# Altium PCB brush_driver.PcbDoc
Units mil, origin at the board's own origin, x right, y up, seen from the top; angles counter-clockwise.
Board outline 2420.19 x 1285.19 mil, 2 copper layers (Top Layer, Bottom Layer); 85 components, 97 nets, 290 pads, 90 vias.
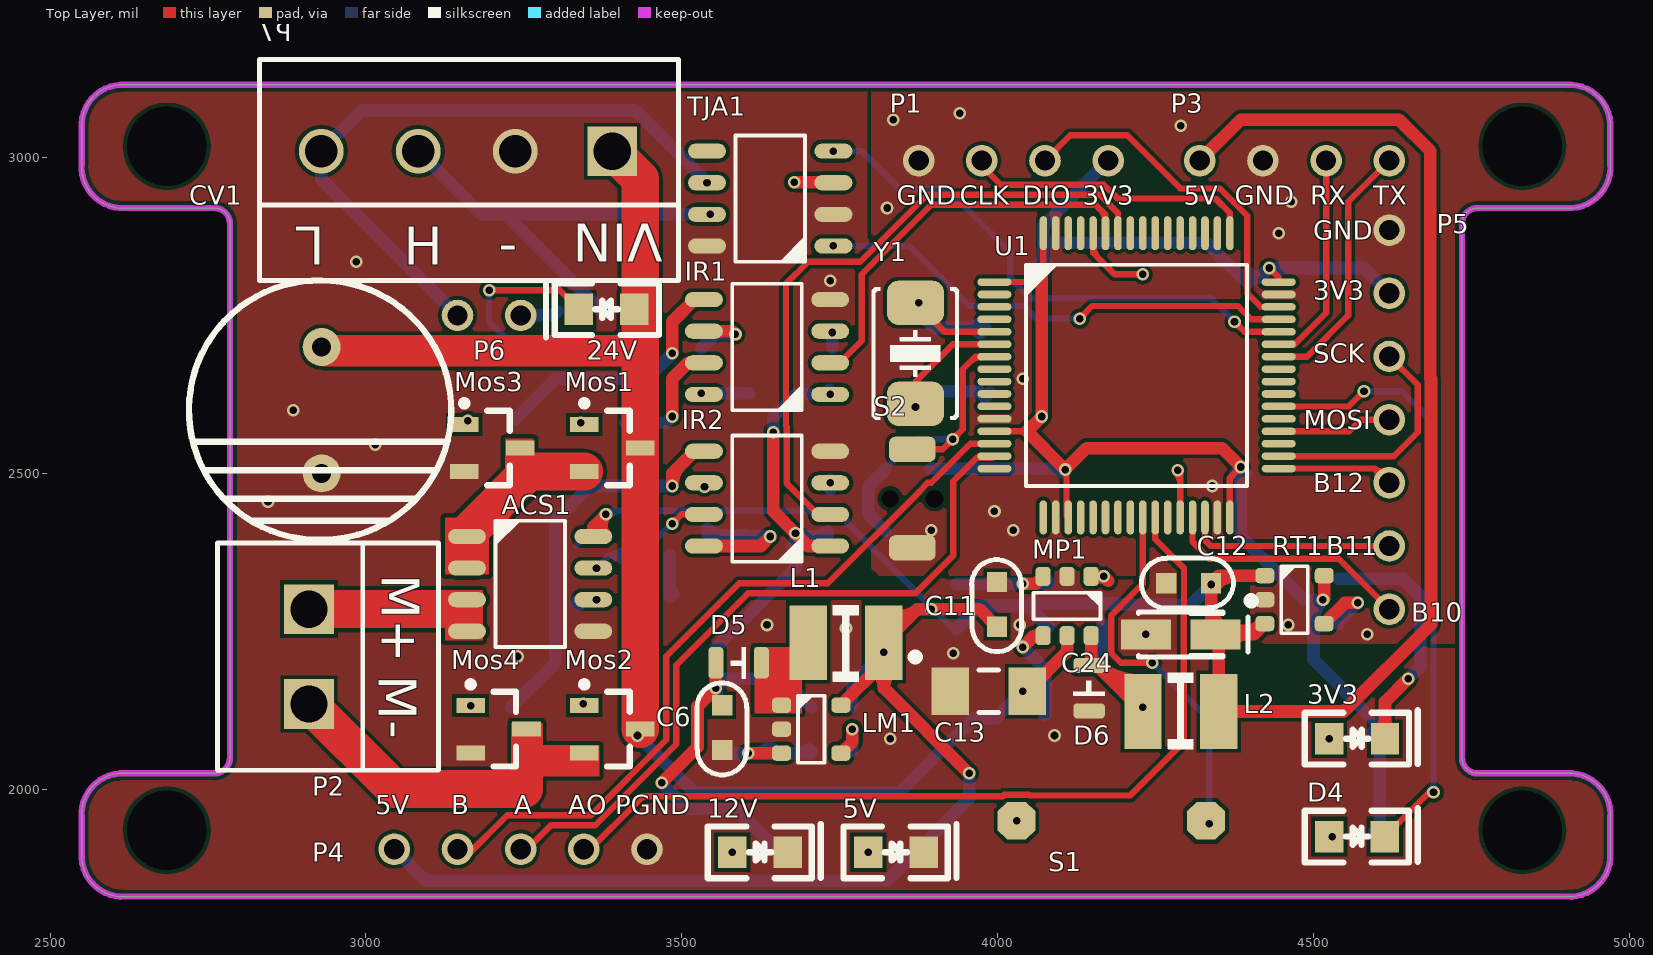
[diagram p0: Top Layer view]
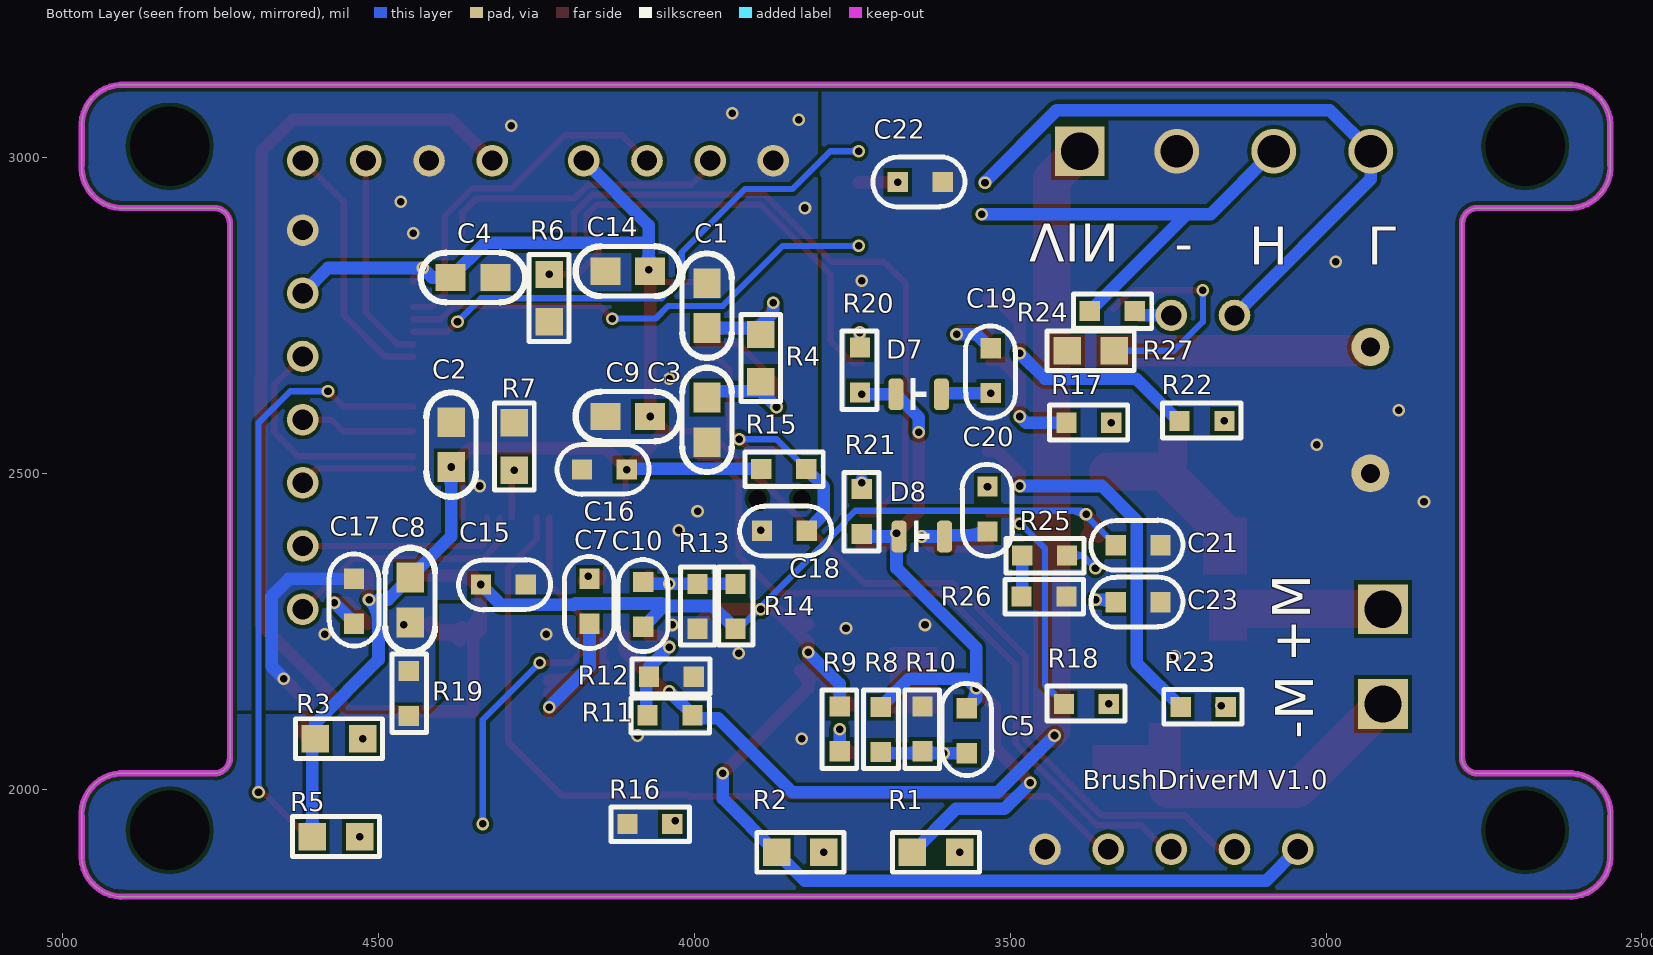
[diagram p1: Bottom Layer view, seen from below]
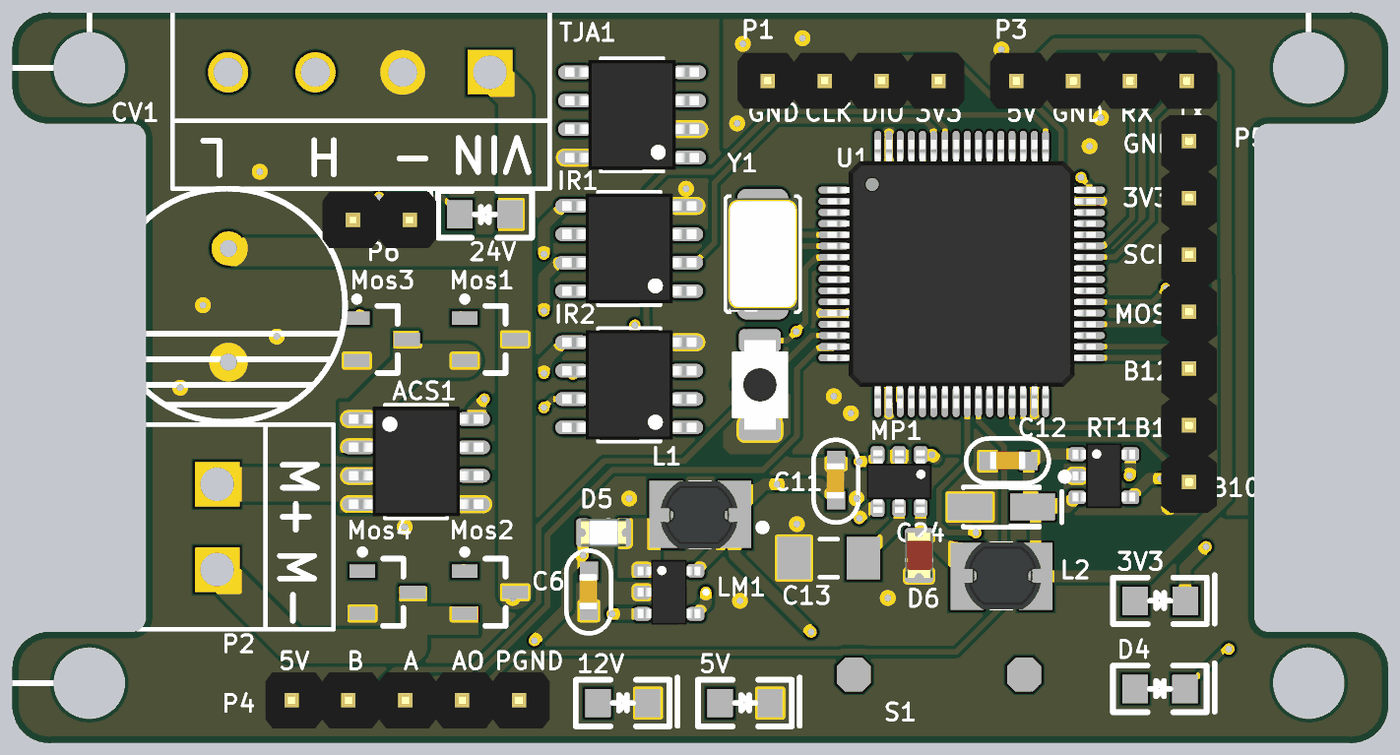
[diagram p2: 3D render of the assembled board from above, using the file's embedded part models]
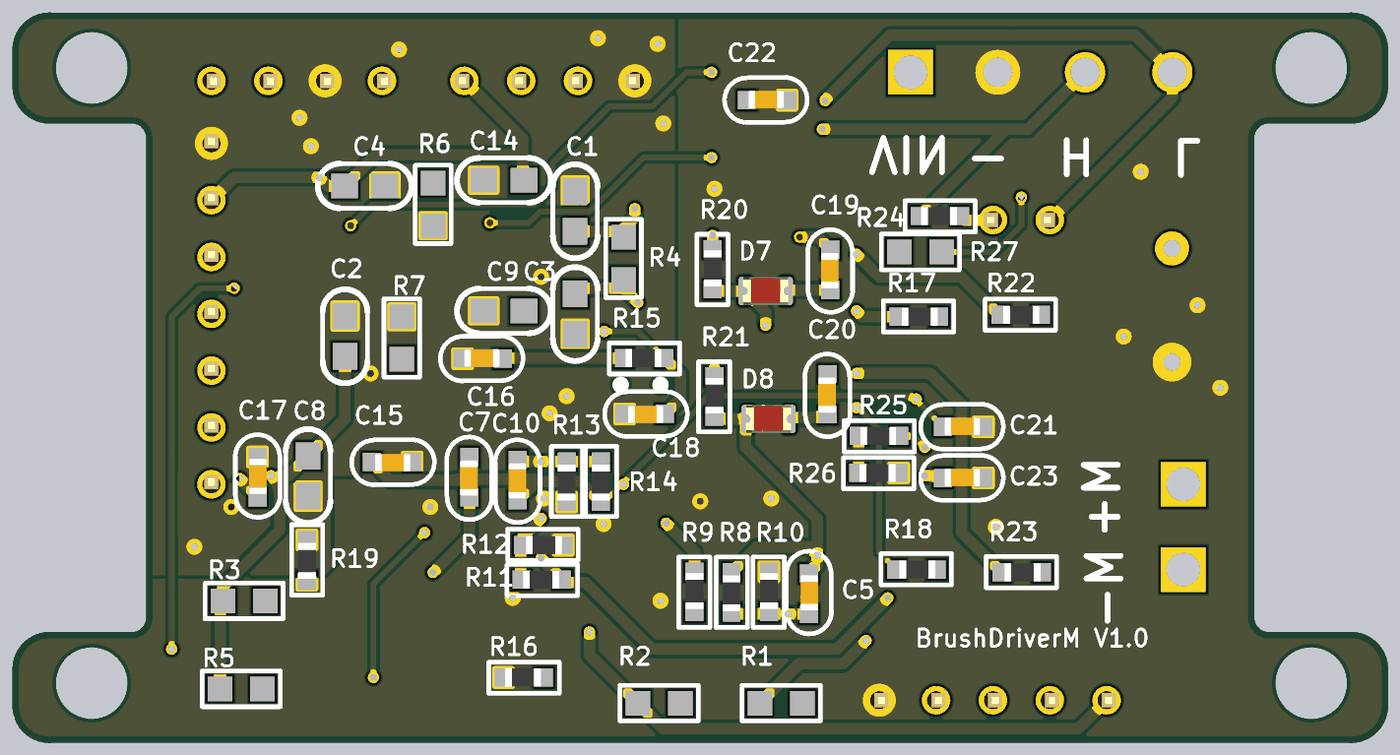
[diagram p3: 3D render of the assembled board from below, using the file's embedded part models]

## Layer stack, top to bottom
Top Layer: signal copper 1.4
Dielectric: dielectric 12.6, FR-4, Dk 4.8
Bottom Layer: signal copper 1.4

## Board outline
2550,1890 ccw(c2615,1895) 2620,1830 4900,1830 ccw(c4905,1895) 4970,1890 4970,1955 ccw(c4905,1960) 4910,2025 4760,2025 cw(c4760,2050) 4735,2050 4735,2895 cw(c4760,2895) 4760,2920 4910,2920 ccw(c4905,2985) 4970,2990 4970,3055 ccw(c4905,3050) 4900,3115 2620,3115 ccw(c2615,3050) 2550,3055 2550,2990 ccw(c2615,2985) 2610,2920 2760,2920 cw(c2760,2895) 2785,2895 2785,2050 cw(c2760,2050) 2760,2025 2610,2025 ccw(c2615,1960) 2550,1955

## Design rules (kind name [scope] priority, off if disabled: settings)
Clearance [All] p1: gap=6
PolygonConnect [All] p1: connectstyle=Direct reliefconductorwidth=10 reliefentries=4 polygonreliefangle="90 Angle" airgapwidth=10
RoutingVias [All] p1: holewidth=28 width=50 viastyle="Through Hole" minholewidth=0 minwidth=0 maxholewidth=28 maxwidth=50
SolderMaskExpansion [All] p1: expansion=4
Width [All] p1: maxlimit=100 minlimit=10 preferedwidth=10 minimp=50.000000 maximp=50.000000 favimp=50.000000
28 further rules are at their usual default settings.

## Components (designator, comment, footprint, x,y, rotation, side; value= is the part's Value field where it differs from the comment)
3V3 "lED" 0805D 4525.2,2080 r0 top
5V "lED" 0805D 3795,1900 r0 top
12V "lED" 0805D 3580,1900 r0 top
24V "lED" 0805D 3425,2760 r180 top
ACS1 "ACS712" SOP_E150_8 3260,2325 r0 top
C1 "Cap" CAP-MLCC-0603 3980,2800.87 r90 bottom
C2 "Cap" CAP-MLCC-0603 4385,2510 r270 bottom
C3 "Cap" CAP-MLCC-0603 3980,2549.13 r270 bottom
C4 "Cap" CAP-MLCC-0603 4385.87,2810 r0 bottom
C5 "Cap_0603" CAP_0603 3570,2095 r270 bottom
C6 "Cap_0603" CAP_0603 3565,2095 r90 top
C7 "Cap_0603" CAP_0603 4165,2295 r90 bottom
C8 "Cap" CAP-MLCC-0603 4450,2335 r90 bottom
C9 "Cap" CAP-MLCC-0603 4070,2590 r180 bottom
C10 "Cap_0603" CAP_0603 4080,2290 r90 bottom
C11 "Cap_0603" CAP_0603 4000,2290 r90 top
C12 "Cap_0603" CAP_0603 4300,2325 r0 top
C13 "Cap_0805" CAP-MLCC-1206 3925,2155 r0 top
C14 "Cap" CAP-MLCC-0603 4070,2820 r180 bottom
C15 "Cap_0603" CAP_0603 4300,2325 r0 bottom
C16 "Cap_0603" CAP_0603 4145,2505 r180 bottom
C17 "Cap_0603" CAP_0603 4540,2300 r270 bottom
C18 "Cap_0603" CAP_0603 3855,2410 r0 bottom
C19 "Cap_0603" CAP_0603 3530,2660 r90 bottom
C20 "Cap_0603" CAP_0603 3535,2441 r90 bottom
C21 "Cap_0603" CAP_0603 3300,2385 r180 bottom
C22 "Cap_0603" CAP_0603 3645,2960 r180 bottom
C23 "Cap_0603" CAP_0603 3300,2295 r180 bottom
C24 "*μF" CAP-TAN-3216/CAPA 4345,2245 r0 top
CV1 "680uF" C_ELE2 2930,2700 r270 top
D4 "lED" 0805D 4525,1925 r0 top
D5 "D_0805" LED_0805_YELLOW 3590,2200 r180 top
D6 "Diode" LED_0805_RED 4145,2160 r90 top
D7 "Diode" LED_0805_RED 3645,2625 r180 bottom
D8 "Diode" LED_0805_RED 3640,2400 r180 bottom
IR1 "ir2104" SOP_E150_8 3635,2700 r180 top
IR2 "ir2104" SOP_E150_8 3635,2460 r180 top
L1 "Ind_CD32" IND_CD52 3760,2225 r180 top
L2 "Ind_CD32" IND_CD52 4290,2130 r0 top
LM1 "LM27313" SOT23-5 3705,2095 r0 top
Mos1 "MOSFET N" Nmos_SOT23 3390,2540 r0 top
Mos2 "MOSFET N" Nmos_SOT23 3390,2095 r0 top
Mos3 "MOSFET N" Nmos_SOT23 3200,2540 r0 top
Mos4 "MOSFET N" Nmos_SOT23 3210,2095 r0 top
MP1 "MP2451" SOT23-6 4110,2290 r270 top
P1 "HDR1x4_2.54" HDR1x4_2.54_180 4175,2995 r270 top
P2 "Header 2" Green_2P 2815,2210 r270 top
P3 "HDR1x4_2.54" HDR1x4_2.54_180 4320,2995 r90 top
P4 "HDR1x5_2.54" HDR1X5_2.54_180 3045,1905 r90 top
P5 "HDR1x7_2.54" HDR1X7_2.54_180 4620,2885 r0 top
P6 "HDR1x2_2.54" HDR1X2_2.54_180 3245,2750 r270 top
P7 "Header 4" Green_4P 3315,3105 r180 top
R1 "Res1" RES-0603 3580.2,1900 r180 bottom
R2 "Res1" RES-0603 3795,1900 r180 bottom
R3 "Res1" RES-0603 4525.2,2080 r180 bottom
R4 "Res1" RES-0603 3895,2645 r270 bottom
R5 "Res1" RES-0603 4530,1925 r180 bottom
R6 "Res1" RES-0603 4230,2814.8 r90 bottom
R7 "Res1" RES-0603 4285,2505 r270 bottom
R8 "Res_0603" RES_0603 3623,2093 r270 bottom
R9 "Res_0603" RES_0603 3852,2097 r90 bottom
R10 "Res_0603" RES_0603 3721,2097 r90 bottom
R11 "Res_0603" RES_0603 4040,2035 r0 bottom
R12 "Res_0603" RES_0603 4035,2260 r180 bottom
R13 "Res_0603" RES_0603 3913,2288 r270 bottom
R14 "Res_0603" RES_0603 3853,2288 r270 bottom
R15 "Res_0603" RES_0603 3860,2425 r0 bottom
R16 "Res_0603" RES_0603 4072,1863 r0 bottom
R17 "Res_0603" RES_0603 3374,2662 r180 bottom
R18 "Res_0603" RES_0603 3378,2217 r180 bottom
R19 "Res_0603" RES_0603 4370,2150 r270 bottom
R20 "Res_0603" RES_0603 3820,2665 r90 bottom
R21 "Res_0603" RES_0603 3817,2441 r90 bottom
R22 "Res_0603" RES_0603 3195,2665 r180 bottom
R23 "Res_0603" RES_0603 3193,2212 r180 bottom
R24 "Res_0603" RES_0603 3340,2675 r0 bottom
R25 "Res_0603" RES_0603 3447,2288 r0 bottom
R26 "Res_0603" RES_0603 3448,2223 r0 bottom
R27 "Res1" RES-0603 3410,2694 r0 bottom
RT1 "RT9193" SOT23-5 4470,2300 r0 top
S1 "SW-PB" "key - duplicate" 4210,1950 r180 top
S2 "ButtonTACT_3x4x2_180" ButtonTACT_3x4x2_180H 3865,2460 r270 top
TJA1 "TJA1050" SOP_E150_8 3640,2935 r180 top
U1 "STM32F103RC" LQFP_P0.5_64 4220,2655.16 r0 top
Y1 "8M" XT_5032_2 3870,2690 r90 top

## Footprints (in the part's own frame and the unit in brackets; to place one, negate y for a bottom-side part, rotate by r counter-clockwise, add the part's x,y. Pads: shape width x height; smd on the part's side, far side on the other; paste and mask are expansions set on the pad)
0805D [mil]
  rect 45x50 smd: A(0,0) K(88,0)
  silkscreen extent -39,-41 140,45
ButtonTACT_3x4x2_180H [mil]
  round 0 hole 28: 0(0,35) 0(0,-35)
  rrect50% 40x74 smd: 1(-78,0) 2(78,0)
  body extent -79,-49 79,49, height 63
C_ELE2 [mil]
  round 60 hole 30: 1(0,0) 2(200,0)
  silkscreen extent -105,-210 305,205
CAP-MLCC-0603 [mm]
  rect 1.2x1.1 smd: 1(0,0) 2(-1.8,0)
  silkscreen extent -3,-1 1.2,1, body extent -1.77,-0.47 -0.02,0.48, height 0.85
CAP-MLCC-1206 [mm]
  rect 1.5x1.9 smd: 1(0,0) 2(3.1,0)
  silkscreen extent -1.42,-0.85 1.95,1.37, body extent -0.15,-0.9 3.25,0.9, height 1.35
CAP-TAN-3216/CAPA [mm]
  rect 2x1.2 smd: 1(0,0) 2(-2.8,0)
  silkscreen extent -3.1,-0.9 1.45,1.37
CAP_0603 [mil]
  rect 32x32 smd: 1(-33,1) 2(38,1)
  silkscreen extent -72,-38 73,41, body extent -30,-14 33,18, height 31
Green_2P [mm]
  rect 2x2 hole 1.5: 1(-1.905,2.413) 2(1.905,2.413)
  silkscreen extent -4.57,-1.27 4.57,7.62
Green_4P [mm]
  rect 2x2 hole 1.5: 1(-1.905,2.413)
  round 1.8 hole 1.3: 2(1.995,2.413) 3(5.895,2.413) 4(9.795,2.413)
  silkscreen extent -4.57,-1.27 12.28,7.62
HDR1X2_2.54_180 [mil]
  round 50 hole 32: 1(0,0) 2(0,-100)
  body extent -49,-150 49,50, height 323
HDR1x4_2.54_180 [mil]
  round 50 hole 32: 1(0,0) 2(0,-100) 3(0,-200) 4(0,-300)
  body extent -49,-350 49,50, height 323
HDR1X5_2.54_180 [mil]
  round 50 hole 32: 1(0,0) 2(0,-100) 3(0,-200) 4(0,-300) 5(0,-400)
  body extent -49,-450 49,50, height 323
HDR1X7_2.54_180 [mil]
  round 50 hole 32: 1(0,0) 2(0,-100) 3(0,-200) 4(0,-300) 5(0,-400) 6(0,-500) 7(0,-600)
  body extent -49,-650 49,50, height 323
IND_CD52 [mil]
  rect 59.06x118.11 smd: 1(-60,-7) 2(60,-7)
  silkscreen extent -20,-66 20,54, body extent -66,-65 70,53, height 83
"key - duplicate" [mil]
  oct 60x60 smd: 1(-120,0) 2(180,0)
LED_0805_RED [mil]
  rrect50% 24x50 smd: 1(-36,0) 2(36,0)
  silkscreen extent -12,-24 12,24, body extent -40,-25 40,25, height 43
LED_0805_YELLOW [mil]
  rrect50% 24x50 smd: 1(-36,0) 2(36,0)
  silkscreen extent -12,-24 12,24, body extent -40,-25 40,25, height 43
LQFP_P0.5_64 [mil]
  oval 54x12 smd: 1(-225,147.64) 2(-225,127.95) 3(-225,108.27) 4(-225,88.58) 5(-225,68.9) 6(-225,49.21) 7(-225,29.53) 8(-225,9.84) 9(-225,-9.84) 10(-225,-29.53) 11(-225,-49.21) 12(-225,-68.9) 13(-225,-88.58) 14(-225,-108.27) 15(-225,-127.95) 16(-225,-147.64) 33(225,-147.64) 34(225,-127.95) 35(225,-108.27) 36(225,-88.58) 37(225,-68.9) 38(225,-49.21) 39(225,-29.53) 40(225,-9.84) 41(225,9.84) 42(225,29.53) 43(225,49.21) 44(225,68.9) 45(225,88.58) 46(225,108.27) 47(225,127.95) 48(225,147.64)
  oval 12x54 smd: 17(-147.64,-225) 18(-127.95,-225) 19(-108.27,-225) 20(-88.58,-225) 21(-68.9,-225) 22(-49.21,-225) 23(-29.53,-225) 24(-9.84,-225) 25(9.84,-225) 26(29.53,-225) 27(49.21,-225) 28(68.9,-225) 29(88.58,-225) 30(108.27,-225) 31(127.95,-225) 32(147.64,-225) 49(147.64,225) 50(127.95,225) 51(108.27,225) 52(88.58,225) 53(68.9,225) 54(49.21,225) 55(29.53,225) 56(9.84,225) 57(-9.84,225) 58(-29.53,225) 59(-49.21,225) 60(-68.9,225) 61(-88.58,225) 62(-108.27,225) 63(-127.95,225) 64(-147.64,225)
  silkscreen extent -175,-175 175,175, body extent -236,-236 236,236, height 59
Nmos_SOT23 [mm]
  rect 1.15x0.6 smd: D(1.125,0) G(-1.125,0.95) S(-1.125,-0.95)
  silkscreen extent -1.25,-1.5 0.7,1.92, body extent -0.7,-1.5 0.7,1.5, height 1.14
RES-0603 [mm]
  rect 1.1x1.1 smd: 1(0,0) 2(-1.9,0)
  silkscreen extent -2.7,-0.8 0.8,0.8, body extent -1.8,-0.47 -0.1,0.48, height 0.6
RES_0603 [mil]
  rect 32x32 smd: 1(-37,-82) 2(34,-82)
  silkscreen extent -64,-109 60,-54, body extent -31,-98 31,-66, height 18
SOP_E150_8 [mil]
  oval 60x24 smd: 1(-100,75) 2(-100,25) 3(-100,-25) 4(-100,-75) 5(100,-75) 6(100,-25) 7(100,25) 8(100,75)
  silkscreen extent -55,-100 55,100, body extent -118,-96 118,96, height 69
SOT23-5 [mil]
  rrect50% 30x24 smd: 1(-47,38) 2(-47,0) 3(-47,-38) 4(47,-38) 5(47,38)
  silkscreen extent -21,-53 21,53, body extent -55,-57 55,57, height 57
SOT23-6 [mil]
  rrect50% 30x24 smd: 1(-47,38) 2(-47,0) 3(-47,-38) 4(47,-38) 5(47,0) 6(47,38)
  silkscreen extent -21,-53 21,53, body extent -55,-57 55,57, height 57
XT_5032_2 [mil]
  rrect50% 70x90 smd: 1(-80,0) 2(80,0)
  silkscreen extent -104,-68 104,68, body extent -98,-63 98,63, height 39

## Part data
3V3 5V 12V 24V D4: library part 00-D-LED, "LED"
ACS1: "Sensor Current"
C1 C2 C3 C4 C8 C9 C14: library part Cap_1, "Capacitor"
C5 C6 C7 C10 C11 C12 C13 C15 C16 C17 C18 C19 C20 C21 C22 C23: "Capacitor"
C24: library part CAP-TAN, "钽电容"
CV1: library part CAP-ELE, "电解电容"
L1 L2: "Inductor"
Mos1 Mos2 Mos3 Mos4: "MOS SOT23"
P1 P3 P4 P6: "Header"
P2: "Header, 2-Pin"
P5: library part HDR1x7_2.54T, "Header"
P7: "Header, 4-Pin"
R1 R2 R3 R4 R5 R6 R7 R27: library part Res1_1, "Resistor"
R8 R9 R10 R11 R12 R13 R14 R15 R16 R17 R18 R19 R20 R21 R22 R23 R24 R25 R26: "Resistor"
RT1: "Power"
S1: "Switch"
S2: "Button"
U1: "MCU"
Y1: library part C-Osc, "Crystal Oscillator"

## Free pads (board coordinates)
  round 0 hole 125.98 unplated: 2(2685,1935) 2(2685,3017.68) 2(4830.67,1935) 2(4830.67,3017.68)

## Via types
v1: diameter 20, hole 12, Top Layer to Bottom Layer, 90 vias

## Nets (pads, with @x,y where several pads share a name; then routed paths per layer and width w, separated by ;. In a path a pad name is that pad's centre, name@x,y a point inside that pad or via, vN(x,y) a via of type N, cw(c..) or ccw(c..) an arc to the next point about the centre after c; other vN are vias at no path point)
3V3: C2.1 C4.1 C8.1 C9.1 C14.1 C16.2 P1.1 P5.2 R3.2 R5.2 R15.2 RT1.5 U1.1 U1.13 U1.19 U1.32 U1.48 U1.64 | length 3135.4
  Top Layer w10: U1.13 4046.57,2566.57 ; U1.1 4052.8,2802.8 4070,2820 v1(4072.36,2822.36) U1.64 ; v1@4067.36,2822.36 cw(c4055.29,2822.36) 4063.83,2813.83 cw(c4072.36,2805.29) v1@4072.36,2817.36 ; v1@4068.83,2825.9 ccw(c4060.29,2834.43) 4072.36,2834.43 ccw(c4084.43,2834.43) v1@4075.9,2825.9 ; v1(4107,2506) 4109.05,2503.95 4109.05,2432.84 U1.19 ; 4109.05,2460.05 ccw(c4120.63,2460.05) U1.19@4112.44,2451.87 ; U1.32 4367.64,2492.64 v1(4385,2510) ; v1@4380,2510 cw(c4367.93,2510) 4376.46,2501.46 cw(c4385,2492.93) v1@4385,2505 ; v1@4430,2820 cw(c4430,2807.93) 4438.54,2816.46 cw(c4447.07,2825) v1@4435,2825 ; v1(4430,2825) 4445,2810 U1.48
  Top Layer w20: v1@4070,2820 v1(4070,2590) 4046.57,2566.57 4107,2506.15 4140.85,2540 4355,2540 v1(4385,2510) ; v1(4515,2300) 4517,2302 RT1.5
  Bottom Layer w20: R15.2 C16.2@4106,2507 ; C14.1@4063.73,2828.24 ccw(c4042.88,2849.08) 4072.36,2849.08 ; v1(4072.36,2822.36) 4072.36,2865 ; 4072.36,2847.18 ccw(c4099.15,2847.18) C14.1@4080.21,2828.24 ; 4090.1,2507 cw(c4090.1,2489.1) C16.2@4102.76,2501.76 ; P1.1 4072.36,2892.36 4072.36,2865 ; C2.1@4376.76,2499.79 cw(c4356.87,2479.9) 4385,2479.9 cw(c4413.13,2479.9) C2.1@4393.24,2499.79 ; v1(4385,2510) 4385,2400 C8.1 4485,2300 4500,2300 4500,2205 4600,2105 ; C4.1@4396.28,2801.97 cw(c4415,2784.17) 4415,2810 ; C4.1@4396.28,2818.03 ccw(c4415,2835.83) 4415,2810 ; 4500,2263.79 cw(c4551.21,2263.79) v1(4515,2300) ; R3.2@4592.51,2088.93 ccw(c4579.01,2105) 4600,2105 ; R5.2@4596.56,1933.24 ccw(c4576.67,1953.13) 4604.8,1953.13 ccw(c4632.94,1953.13) R5.2@4613.04,1933.24 ; R5.2 4604.8,2075.2 R3.2 4600,2105 ; R3.2@4607.49,2088.93 cw(c4620.99,2105) 4600,2105 ; P5.2 4580,2825 v1(4430,2825) 4415,2810 ; 4072.36,2865 4330.87,2865 C4.1 4415,2810
5V: ACS1.8 C10.1 C11.1 C12.2 C15.2 C21.1 C24.1 L1.1 L2.2 LM1.5 P3.1 P4.1 R2.2 R9.2 R14.2 RT1.1 RT1.3 | length 5418.7
  Top Layer w20: ACS1.8 3360,2415 v1(3380,2435) ccw(c3397.09,2417.9) ACS1.8@3379.46,2401.37 ; LM1.5 L1.1@3820,2201 ; L1.1@3807.29,2187.65 cw(c3783.58,2160) 3820,2160 ; L1.1@3809.04,2190.04 ccw(c3782.58,2216.5) v1(3820,2216.5) ; L1.1@3819.77,2261.11 ccw(c3833.6,2286.54) 3854.07,2266.07 ; L1.1@3829.33,2278.68 ccw(c3846.94,2311.06) 3873,2285 ; L1.1@3830.96,2242.96 ccw(c3857.42,2216.5) v1(3820,2216.5) ; L1.1@3832.71,2187.65 ccw(c3856.42,2160) 3820,2160 ; v1(3955,2025) 3820,2160 ; C11.1 3971,2285 v1(3895,2285) 3873,2285 ; P3.1 4385,3060 4635,3060 4685,3010 4685,2650.7 4686,2649.7 4686,2261 4548,2123 L2.2 4350,2240 C24.1 ; 4338,2294.79 ccw(c4394.79,2294.79) C24.1@4354.63,2254.63 ; C12.2@4342.24,2321.76 cw(c4381.46,2282.54) 4381.46,2338 ; C12.2@4348.53,2325.39 cw(c4341.59,2337.4) v1(4338,2324) cw(c4371.8,2290.2) 4371.8,2338 ; C24.1@4367.93,2256.58 ccw(c4389.28,2291) 4399.77,2251.87 ; C24.1@4370.38,2235.37 cw(c4393.63,2212.11) 4393.63,2245 cw(c4393.63,2277.89) C24.1@4370.38,2254.63 ; C24.1@4372.55,2238.19 cw(c4390.78,2227.66) 4385.33,2248 ; C24.1@4374.13,2245 ccw(c4374.13,2307.87) RT1.3@4418.59,2263.41 ; RT1.3 4406,2245 C24.1 ; RT1.1 4350,2338 C12.2 4338,2252 C24.1 ; 3820,2160 L1.1@3820,2201 ; L1.1@3820,2201 v1(3820,2216.5) ; v1(3820,2216.5) L1.1 3873,2285
  Bottom Layer w10: C21.1 3388,2441 3745.56,2441 3762,2424.56 3762,2421.44 R14.2@3929.44,2254 ; v1@3383.54,2431.46 cw(c3406.56,2408.44) 3406.56,2441
  Bottom Layer w20: P4.1 3095,1855 3824.8,1855 R2.2 3955,1985.2 v1(3955,2025) ; R9.2 3770,2166.5 v1(3820,2216.5) ; R14.2 3971,2290 4048,2290 ; C10.1 4048,2290 ; v1(4338,2324) 4306,2292 4190.63,2292 4188.63,2294 4052,2294 4048,2290
12V: C5.1 C6.2 D5.2 D7.1 D8.1 IR1.1 IR2.1 R1.2 R8.1 R20.1 R21.1 | length 1483.5
  Top Layer w20: v1(3468.23,2010) 3525,2066.77 3525,2131 v1(3554,2160) D5.2 ; v1(3645,2565) 3645,2440 v1(3680,2405) 3700,2385 IR2.1
  Bottom Layer w20: v1(3468.23,2010) 3509.23,1969 3586,1969 R1.2 ; C5.1@3566.02,2130.98 cw(c3595.04,2160) v1(3554,2160) ; C5.1 3554,2143 v1(3554,2160) ; v1(3645,2565) 3645,2589 D7.1 R20.1@3730,2625 ; D8.1@3674.59,2385.59 cw(c3661.51,2372.51) 3680,2372.51 ; 3692.07,2400 cw(c3692.07,2417.07) v1(3680,2405) D8.1@3680,2400 ; R8.1 3660,2175 3569,2175 v1(3554,2160) ; 3710.86,2400 ccw(c3710.86,2428.14) R21.1@3730.76,2408.24 ; 3716.27,2625 ccw(c3716.27,2649.73) R20.1@3733.76,2632.24 ; R21.1@3731,2400 D8.1@3680,2400 ; v1(3554,2160) 3554,2224 3680,2350 D8.1@3680,2400
  other v1: 3735,2625
ACS: ACS1.1 ACS1.2 Mos1.S Mos3.D | length 259.7
  Top Layer w60: 3160,2380.9 3160,2405 3257.6,2502.6 Mos1.S ; ACS1.1 cw(c3172.07,2400) ACS1.1@3163.54,2408.54
AD: R25.2 R26.2 | length 79.5
  Bottom Layer w20: 3481,2321.9 ccw(c3498.9,2321.9) R26.2@3486.24,2309.24 ; R25.2 3481,2306 R26.2
BOOT0: R6.1 U1.60 | length 164.5
  Top Layer w10: U1.60 4151.1,2848.9 4185,2815 v1(4230,2815) ; U1.60@4152.1,2859.16 ccw(c4179.29,2859.16) 4160.06,2839.94 ; v1@4226.46,2811.46 ccw(c4217.93,2802.93) 4217.93,2815 ccw(c4217.93,2827.07) v1@4226.46,2818.54
BOOT1: R7.1 U1.28 | length 96.4
  Top Layer w10: v1@4281.46,2501.46 cw(c4263.52,2483.52) 4288.9,2483.52 ; v1(4285,2505) 4288.9,2501.1 U1.28
CAN_H: P7.3 R24.2 TJA1.7 | length 719.9
  Bottom Layer w20: P7.3 3182.91,2910 3221,2910 ; R24.2 3221,2910 ; v1(3545,2910) 3221,2910
CAN_L: P6.2 P7.4 TJA1.6 | length 1035.3
  Bottom Layer w20: P6.2 2929.37,2965.63 P7.4 2994.37,3075 3426.37,3075 3540,2961.37 v1(3540,2960)
CAN_RX: TJA1.4 U1.44 | length 904.2
  Top Layer w10: v1@4375,2735 cw(c4375,2722.93) 4383.54,2731.46 cw(c4392.07,2740) v1@4380,2740 ; v1(4375,2740) 4390.94,2724.06 U1.44
  Bottom Layer w10: v1(3740,3010) 3785,3010 3845,2950 3920,2950 4020,2850 4020,2809.17 4051.82,2777.35 4337.65,2777.35 v1(4375,2740) ; v1@3743.54,3006.46 cw(c3752.07,2997.93) 3752.07,3010 cw(c3752.07,3022.07) v1@3743.54,3013.54 ; v1@4370,2740 ccw(c4357.93,2740) 4366.46,2748.54 ccw(c4375,2757.07) v1@4375,2745
CAN_TX: TJA1.1 U1.45 | length 826.6
  Top Layer w10: v1(4130,2745) 4150,2765 4380,2765 4401.26,2743.74 U1.45 ; v1@4130,2750 ccw(c4130,2762.07) 4138.54,2753.54 ccw(c4147.07,2745) v1@4135,2745
  Bottom Layer w10: v1(3740,2860) 3860,2860 3955,2765 4041.54,2765 4061.54,2745 v1(4130,2745) ; v1@3743.54,2856.46 cw(c3752.07,2847.93) 3752.07,2860 cw(c3752.07,2872.07) v1@3743.54,2863.54 ; v1@4126.46,2741.46 ccw(c4117.93,2732.93) 4117.93,2745 ccw(c4117.93,2757.07) v1@4126.46,2748.54
CSN: P5.7 U1.29 | length 394.2
  Top Layer w10: U1.29 4308.58,2391.42 4335,2365 4540,2365 P5.7
DC: P5.6 U1.30 | length 331.4
  Top Layer w10: U1.30 4328.27,2394.36 4337.63,2385 P5.6
DIS: U1.62
GND: 3V3.K C1.1 C2.2 C3.1 C4.2 C8.2 C9.2 C14.2 C15.1 C16.1 C17.1 C18.2 P1.4 P3.2 P5.1 R6.2 R7.2 R19.1 RT1.2 S2.2 U1.12 U1.18 U1.31 U1.47 U1.63 | length 437.7
  Top Layer w20: 3V3.K@4604.36,2091.34 ccw(c4583.02,2112.68) 4613.2,2112.68 ccw(c4643.37,2112.68) 3V3.K@4622.03,2091.34 ; 3V3.K 4613.2,2138.2 v1(4650,2175)
  Bottom Layer w20: C17.1 4642,2333 4669,2306 4669,2194 v1(4650,2175)
  other v1: 4585,2245 4460,2260 3895,2410 4025,2410 3995,2440 4340,2480 4040,2650 4445,2880 3825,2920 4465,2930 4290,3050 3835,3060 3940,3070
KEY: S1.1 U1.25 | length 656.2
  Top Layer w10: U1.25 4229.84,2325 4210.16,2305.32 4210.16,2305.16 4180,2275 4180,2215 4195,2200 v1(4245,2200) ; v1@4241.46,2196.46 ccw(c4232.93,2187.93) 4232.93,2200 ccw(c4232.93,2212.07) v1@4241.46,2203.54
  Bottom Layer w10: v1@4245,2195 cw(c4245,2182.93) 4253.54,2191.46 cw(c4262.07,2200) v1@4250,2200 ; v1(4245,2200) 4335,2110 v1(4335,1945) ; v1@4331.46,1948.54 ccw(c4322.93,1957.07) 4335,1957.07 ccw(c4347.07,1957.07) v1@4338.54,1948.54
MISO: U1.35
MOSI: P5.4 U1.36 | length 182.6
  Top Layer w10: U1.36 4556.57,2566.57 4575,2585 P5.4
MOT+: ACS1.3 ACS1.4 P2.1 | length 241.4
  Top Layer w60: P2.1@2911,2284 P2.1 3150,2285
MOT-: Mos2.S Mos4.D P2.2 | length 395.9
  Top Layer w60: P2.2 3045,2000 3250,2000
Net3V3_A: 3V3.A R3.1
  other v1: 4525.2,2080
Net5V_A: 5V.A R2.1
  other v1: 3795,1900
Net12V_A: 12V.A R1.1
  other v1: 3580,1900
Net24V_K: 24V.K R27.2 | length 401.6
  Top Layer w10: v1(3195,2790) 3307,2790 24V.K ; v1@3198.54,2786.46 cw(c3207.07,2777.93) 3207.07,2790 cw(c3207.07,2802.07) v1@3198.54,2793.54
  Bottom Layer w10: v1@3191.46,2786.46 cw(c3182.93,2777.93) 3195,2777.93 cw(c3207.07,2777.93) v1@3198.54,2786.46 ; v1(3195,2790) 3195,2740 3241,2694 R27.2
NetACS1_6: ACS1.6 C23.1 | length 55.8
  Bottom Layer w20: C23.1 3337,2300 v1(3365,2300) ; C23.1@3337.24,2291.76 cw(c3357.14,2271.86) v1@3357.14,2300
NetACS1_7: ACS1.7 R25.1 | length 110.2
  Bottom Layer w10: v1(3365,2350) 3385,2370 ; v1@3365,2355 ccw(c3365,2367.07) 3373.54,2358.54 ccw(c3382.07,2350) v1@3370,2350 ; R25.1@3401.89,2362.57 ccw(c3385,2347.09) 3385,2370 ; R25.1@3401.89,2377.43 cw(c3385,2392.91) 3385,2370 ; R25.1 3385,2370
NetC5_2: C5.2 LM1.3 R8.2 R10.1 | length 245.4
  Top Layer w20: v1(3605,2057) LM1.3
  Bottom Layer w20: C5.2 v1(3605,2057) 3703,2057 R8.2 ; 3617.27,2057 ccw(c3617.27,2081.73) R10.1@3634.76,2064.24 ; R10.1@3643.24,2064.24 ccw(c3660.73,2081.73) 3660.73,2057 ; 3685.69,2057 ccw(c3685.69,2078.31) R8.2@3700.76,2063.24
NetC7_1: C7.1 D6.2 L2.1 MP1.6 | length 482
  Top Layer w20: D6.2@4143.59,2197.41 ccw(c4132.93,2208.07) 4148,2208.07 ; MP1.6 D6.2@4148,2205 ; 4181.28,2171.72 ccw(c4228.78,2219.22) L2.1@4230.01,2152.06 ; L2.1@4218.05,2134.95 ccw(c4230,2146.9) v1(4230,2130) ; L2.1@4229.64,2172.05 cw(c4227.58,2284.58) D6.2@4148,2205 ; L2.1 D6.2@4148,2205
  Bottom Layer w20: C7.1 4166,2194 v1(4230,2130)
NetC7_2: C7.2 MP1.1 | length 58.1
  Top Layer w20: MP1.1 v1(4168,2337) 4175,2330 ccw(c4160.66,2315.66) MP1.1@4149.14,2332.35
NetC10_2: C10.2 MP1.3 R13.1 R14.1 | length 203.6
  Top Layer w20: v1(4040,2325) 4060,2325 MP1.3
  Bottom Layer w20: R14.1 R13.1 v1(4040,2325) 4078,2325 C10.2 ; 4059.27,2325 ccw(c4059.27,2349.73) C10.2@4076.76,2332.24
NetC17_2: C17.2 RT1.4 | length 112.5
  Top Layer w20: RT1.4 4550,2295 v1(4570,2295)
  Bottom Layer w20: C17.2 4539,2264 v1(4570,2295)
NetC19_1: C19.1 D7.2 IR1.8 | length 76
  Bottom Layer w20: v1(3531,2627) D7.2@3607,2627
NetC19_2: C19.2 IR1.6 | length 128.6
  Top Layer w20: IR1.6 3580,2725 v1(3585,2720) ccw(c3572.93,2707.93) 3572.93,2725
  Bottom Layer w20: C19.2 3553,2720 v1(3585,2720)
NetC20_1: C20.1 D8.2 IR2.8 | length 234.7
  Top Layer w20: IR2.8 3625,2385 v1(3640,2400)
  Bottom Layer w20: C20.1@3540.24,2412.24 ccw(c3564.97,2436.97) 3564.97,2402 ; C20.1@3541,2402 D8.2@3601,2402 ; D8.2 v1(3640,2400)
NetC20_2: C20.2 IR2.6
  other v1: 3536,2479
NetC22_1: C22.1 TJA1.3 | length 62.4
  Top Layer w20: v1(3678,2961) 3739,2961 TJA1.3
NetD4_A: D4.A R5.1
  other v1: 4530,1925
NetD5_1: D5.1 L1.2 LM1.1
NetIR1_3: IR1.3 R20.2 | length 24
  Bottom Layer w20: R20.2 v1(3738,2723)
NetIR1_5: IR1.5 R22.1 | length 407
  Top Layer w20: v1(3485,2690) 3485,2740 3520,2775 IR1.5
  Bottom Layer w20: R22.1@3236,2585 3301,2650 3445,2650 v1(3485,2690)
NetIR1_7: IR1.7 R17.1 | length 198.5
  Top Layer w10: IR1.7@3510,2675 IR1.7
  Top Layer w20: v1(3485,2590) 3485,2650 IR1.7@3510,2675
  Bottom Layer w20: R17.1 3475,2580 v1(3485,2590)
NetIR2_3: IR2.3 R21.2 | length 20
  Bottom Layer w20: R21.2 3735,2490 v1(3735,2485)
NetIR2_5: IR2.5 R23.1 | length 654.2
  Top Layer w20: 3499.14,2514.14 ccw(c3533.28,2480) v1(3485,2480) 3485,2500 3520,2535 IR2.5
  Bottom Layer w20: R23.1 3300,2200 3300,2425 3355,2480 v1(3485,2480)
NetIR2_7: IR2.7 R18.1 | length 390.1
  Top Layer w10: v1(3485,2420) 3500,2435 IR2.7 ; v1@3485,2425 ccw(c3485,2437.07) 3493.54,2428.54 ccw(c3502.07,2420) v1@3490,2420
  Bottom Layer w10: R18.1 3445,2165 3445,2381.56 3483.44,2420 v1(3485,2420)
NetLM1_4: LM1.4 R9.1 | length 80.5
  Top Layer w20: LM1.4 3770,2075 v1(3770,2095)
  Bottom Layer w20: R9.1 v1(3770,2095)
NetMos1_G: Mos1.G R17.2
  other v1: 3340,2580
NetMos2_G: Mos2.G R18.2
  other v1: 3344,2135
NetMos3_G: Mos3.G R22.2
  other v1: 3161,2583
NetMos4_G: Mos4.G R23.2
  other v1: 3165.71,2132.4
NetMP1_4: MP1.4 R11.2 R12.1 | length 161.5
  Top Layer w20: v1(4040,2225) 4058,2243 MP1.4
  Bottom Layer w20: v1(4040,2225) 4072,2193 R12.1 ; R11.2 4076,2119 R12.1@4076,2178
NetP6_1: P6.1 R24.1 | length 60.9
  Bottom Layer w20: P6.1 3296,2750 R24.1
NetR16_1: R16.1 S1.2
  other v1: 4030,1950
NRST: C18.1 R15.1 S2.1 U1.7 | length 569.1
  Top Layer w10: S2.1 3913,2538 v1(3929,2554) 3945,2570 3945,2665 3964.69,2684.69 U1.7 ; v1@3924,2554 cw(c3911.93,2554) 3920.46,2545.46 cw(c3929,2536.93) v1@3929,2549 ; v1@3929,2559 ccw(c3929,2571.07) 3937.54,2562.54 ccw(c3946.07,2554) v1@3934,2554 ; 3956.39,2676.39 cw(c3974,2658.79) U1.7@3974,2683.69
  Bottom Layer w10: R15.1 3870,2554 v1(3929,2554) ; v1@3925.46,2550.46 ccw(c3916.93,2541.93) 3916.93,2554 ccw(c3916.93,2566.07) v1@3925.46,2557.54
  Bottom Layer w20: C18.1 3795,2436 3795,2479 R15.1
OSC32_IN: U1.3
OSC32_OUT: U1.4
OSCIN: C1.2 R4.2 U1.5 Y1.2 | length 337.5
  Top Layer w10: Y1.2 3915.94,2724.06 U1.5 ; Y1.2@3880,2770 ccw(c3904.14,2770) Y1.2@3887.07,2752.93
  Bottom Layer w20: v1(3875,2770) 3875,2755 3900,2730 C1.2 ; C1.2@3971.76,2721.76 ccw(c3951.87,2701.87) 3951.87,2730 ccw(c3951.87,2758.13) C1.2@3971.76,2738.24
OSCOUT: C3.2 R4.1 U1.6 Y1.1 | length 338.9
  Top Layer w10: Y1.1@3866.46,2608.54 ccw(c3857.93,2617.07) 3870,2617.07 ccw(c3882.07,2617.07) Y1.1@3873.54,2608.54 ; Y1.1 3870,2645 3929.37,2704.37 U1.6
  Bottom Layer w20: v1(3870,2605) 3895,2630 3970,2630 C3.2 C3.2@3987.65,2627.65
PA2: U1.16
PA3: U1.17
PA4: U1.20
PA5: U1.21
PA6: U1.22
PA7: U1.23
PA8: U1.41
PA9: P3.4 U1.42 | length 409
  Top Layer w10: U1.42 4489.69,2684.69 4555,2750 4555,2930 P3.4
PA10: P3.3 U1.43 | length 346.7
  Top Layer w10: U1.43 4470.36,2704.37 4520,2754.01 P3.3 ; U1.43@4466,2705.37 ccw(c4466,2718.3) 4475.14,2709.16
PA13: P1.2 U1.46 | length 570.9
  Top Layer w10: P1.2 4115,3035 4205,3035 4289,2951 4351.63,2951 4395,2907.63 4395,2785 4416.57,2763.43 U1.46
PA14: P1.3 U1.49 | length 463.8
  Top Layer w10: P1.3 3975,2987 4005,2957 4168.25,2957 4190.25,2935 4345,2935 4367.64,2912.36 U1.49
PA15: U1.50
PB0: P4.4 U1.26 | length 1399.4
  Top Layer w10: P4.4@3345,1895 3439,1989 4008.44,1989 4010.44,1991 4049.56,1991 4050.56,1990 4210,1990 4294.63,2074.63 4294.63,2273.18 4295,2273.55 4295,2350 4249.53,2395.47 U1.26
PB1: U1.27
PB3: U1.55
PB4: U1.56
PB5: U1.57
PB6: IR2.2 U1.58 | length 1033.5
  Top Layer w10: IR2.2 3715,2435 3666,2484 3666,2573.7 3665,2574.7 3665,2800 3700,2835 3782.37,2835 3888.37,2941 4161.63,2941 4190.47,2912.16 U1.58
PB7: IR1.2 U1.59 | length 653.6
  Top Layer w10: IR1.2 3750,2675 3785,2710 3785,2815 3895,2925 4155,2925 4170.79,2909.21 U1.59 ; 4163.39,2916.61 cw(c4147.93,2901.16) U1.59@4169.79,2901.16
PB8: U1.61
PB12: P5.5 U1.33 | length 218.8
  Top Layer w10: U1.33 4597.48,2507.52 ; P5.5@4601.12,2491.6 ccw(c4586.62,2496.66) 4597.48,2507.52 ; P5.5@4613.4,2503.88 cw(c4608.34,2518.38) 4597.48,2507.52 ; P5.5 4597.48,2507.52
PB13: P5.3 U1.34 | length 374.3
  Top Layer w10: U1.34 4627.2,2527.2 4665,2565 4665,2640 P5.3
PC1: U1.9
PC2: U1.10
PC3: U1.11
PC4: U1.24
PC6: U1.37
PC7: D4.K U1.38 | length 1023.6
  Top Layer w10: U1.38 4555.94,2605.94 v1(4580,2630) ; v1@4575,2630 cw(c4562.93,2630) 4571.46,2621.46 cw(c4580,2612.93) v1@4580,2625 ; D4.K 4683,1995 v1(4690,1995)
  Bottom Layer w10: v1(4580,2630) 4640,2630 4690,2580 v1(4690,1995) ; v1@4583.54,2626.46 cw(c4592.07,2617.93) 4592.07,2630 cw(c4592.07,2642.07) v1@4583.54,2633.54 ; v1@4686.46,1998.54 ccw(c4677.93,2007.07) 4690,2007.07 ccw(c4702.07,2007.07) v1@4693.54,1998.54
PC8: U1.39
PC9: U1.40
PC10: U1.51
PC11: U1.52
PC12: U1.53
PC13: U1.2
PD2: U1.54
PGND: 5V.K 12V.K ACS1.5 C6.1 C11.2 C12.1 C13.1 C21.2 C22.2 C23.2 C24.2 CV1.2 D6.1 IR1.4 IR2.4 LM1.2 Mos3.S Mos4.S MP1.2 P4.5 P7.2 R10.2 R12.2 R13.2 R16.2 R19.2 R26.1 TJA1.2 TJA1.8
  other v1: 3830,2080 4090,2085 3240,2210 3930,2215 4234.76,2245 3760,2255 3635,2260 4035,2260 2845,2455 3015,2545 2885,2600 3735,2805 2985,2835
RING: U1.8
SPEED_A: P4.3 U1.15 | length 1178.7
  Top Layer w10: P4.3@3245,1895 3293,1943 3362.9,1943 3491.29,2071.39 3491.29,2196.29 3605,2310 3870,2310 3930,2370 3930,2487.56 3966.96,2524.52 ; 3964.85,2522.42 cw(c3974,2513.27) U1.15@3974,2526.2 ; U1.15@3973.18,2527.77 cw(c3966.96,2532.09) 3966.96,2524.52 ; U1.15@3973.72,2526.24 ccw(c3971.79,2519.69) 3966.96,2524.52 ; U1.15 3992.32,2524.52 3966.96,2524.52
SPEED_B: P4.2 U1.14 | length 1182.9
  Top Layer w10: P4.2@3160,1895 3224,1959 3356.27,1959 3475.29,2078.02 3475.29,2210.29 3591,2326 3731.36,2326 3875,2469.64 3875,2470.36 3889.64,2485 3895,2485 3956.89,2546.89 U1.14
VIN: 24V.A C13.2 CV1.1 Mos1.D Mos2.D MP1.5 P7.1 R11.1 | length 2270.1
  Top Layer w20: v1(4040,2155) ccw(c4040,2172.01) C13.2@4052.03,2159.98 ; C13.2 4110,2217.95 MP1.5
  Top Layer w50: CV1.1 2936,2694 3423.29,2694
  Top Layer w60: P7.1 3434.29,2965.71 Mos1.D Mos2.D
  Bottom Layer w20: v1(3430,2085) 3520,1995 3845,1995 3962.5,2112.5 3997.5,2112.5 v1(4040,2155)
pads on no net: R27.1 S2.0 TJA1.5

## Polygon pours and split planes (outlines as drawn)
GND on Bottom Layer "Top Layer-No Net" (solid, remove dead copper, pour order 11): 3805,3150 3805,2320 3815,2310 3825,2300 4410,2300 4410,2155 4400,2145 4420,2125 4910,2125 4910,2735 5025,2850 5025,3185
PGND on Bottom Layer "Top Layer-No Net" (solid, remove dead copper, pour order 19): 2455,3255 5105,3255 5180,3180 5185,3175 5185,1505 2295,1505 2225,1575
GND on Top Layer "Top Layer-No Net" (solid, remove dead copper, pour order 15): 3800,3145 3800,2350 3810,2340 3812,2338 4400,2338 4400,2251 4406,2245 4421,2230 4835,2230 4835,2715 4940,2820 5140,3020 5140,3125 5140,3195 5035,3300
PGND on Top Layer "Top Layer-No Net" (solid, remove dead copper, pour order 17): 2250,3315 2270,3295 5365,3295 5365,1705 5265,1605 5180,1690 2380,1690

## Keep-outs
Keep-Out Layer:
  lines w10: 2550,1890 ccw(c2615,1895) 2620,1830 4900,1830 ccw(c4905,1895) 4970,1890 4970,1955 ccw(c4905,1960) 4910,2025 4760,2025 cw(c4760,2050) 4735,2050 4735,2895 cw(c4760,2895) 4760,2920 4910,2920 ccw(c4905,2985) 4970,2990 4970,3055 ccw(c4905,3050) 4900,3115 2620,3115 ccw(c2615,3050) 2550,3055 2550,2990 ccw(c2615,2985) 2610,2920 2760,2920 cw(c2760,2895) 2785,2895 2785,2485 2785,2050 cw(c2760,2050) 2760,2025 2610,2025 ccw(c2615,1960) 2550,1955 2550,1890

## Other copper
Top Layer:
  rectangle net ACS: 3125,2340 3195,2430
  rectangle net MOT+: 3125,2235 3185,2315
  rectangle net MOT-: 3230,1995 3280,2105
  rectangle net MOT-: 3235,2020 3370,2070
  rectangle net ACS: 3220,2475 3265,2555
  rectangle net NetD5_1: 3615,2120 3690,2225

## Silkscreen, mask and mechanical layers (free items; w line width, h text height)
Top Overlay:
  text "GND" at 3840,2925 h30
  text "CLK" at 3940,2925 h30
  text "DIO" at 4040,2925 h30
  text "3V3" at 4135,2925 h30
  text "5V" at 4295,2925 h30
  text "GND" at 4375,2925 h30
  text "RX" at 4495,2925 h30
  text "TX" at 4595,2925 h30
  text "VIN" at 3470,2895 h60 r180
  text "L" at 2935,2890 h60 r180
  text "GND" at 4500,2870 h30
  text "-" at 3210,2835 h60
  text "H" at 3060,2830 h60
  text "3V3" at 4500,2775 h30
  text "SCK" at 4500,2675 h30
  text "MOSI" at 4485,2570 h30
  text "B12" at 4500,2470 h30
  text "B11" at 4520,2370 h30
  text "M+" at 3025,2340 h60 r270
  text "B10" at 4655,2265 h30
  text "M-" at 3020,2180 h60 r270
  text "5V" at 3015,1960 h30
  text "B" at 3135,1960 h30
  text "A" at 3235,1960 h30
  text "AO" at 3320,1960 h30
  text "PGND" at 3395,1960 h30
Bottom Overlay:
  text "VIN" at 3470,2895 h60 r180
  text "L" at 2935,2890 h60 r180
  text "-" at 3210,2835 h60
  text "H" at 3060,2830 h60
  text "M+" at 3025,2340 h60 r270
  text "M-" at 3020,2180 h60 r270
  text "BrushDriverM V1.0" at 3385,2000 h30

## Dimensions
2685,3017.68 to 2685,1935 on Top Overlay
2685,3017.68 to 4830.67,3017.68 on Top Overlay